# EAGLE board HLD-stat-tracker-top (EAGLE 9.6.1)
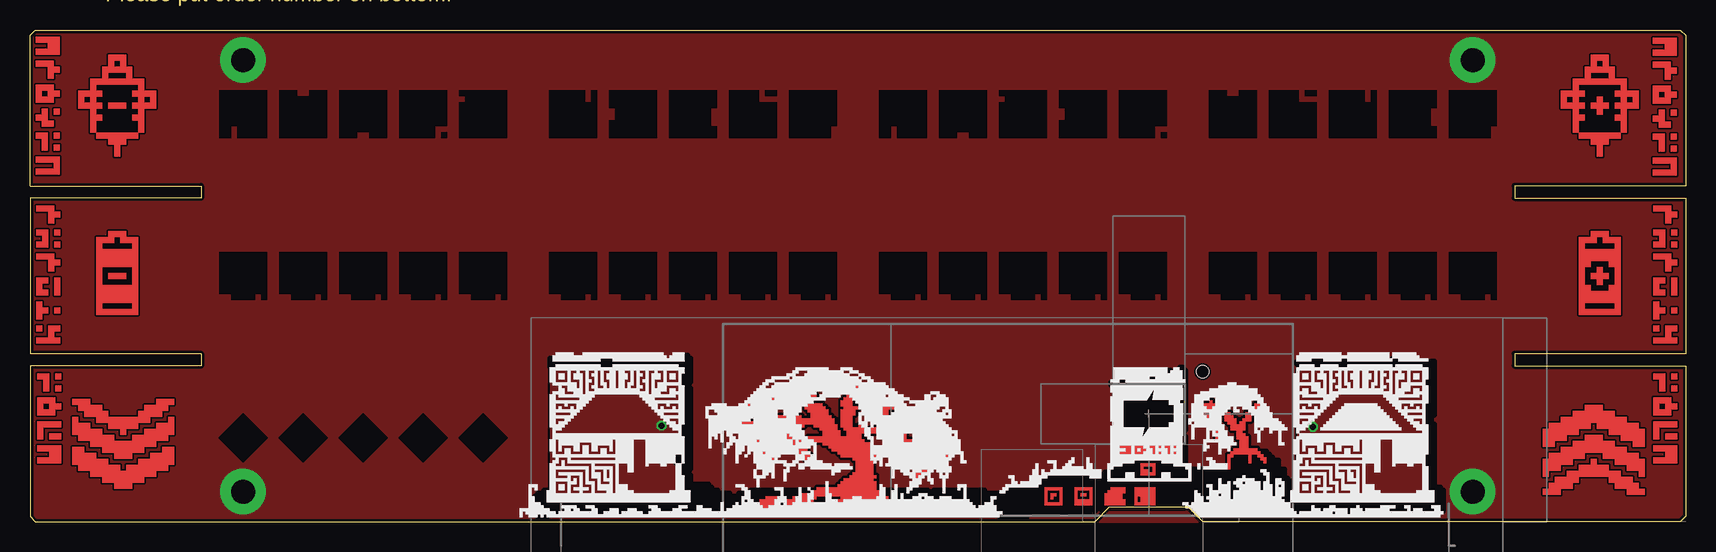
[diagram p0: board, top side]
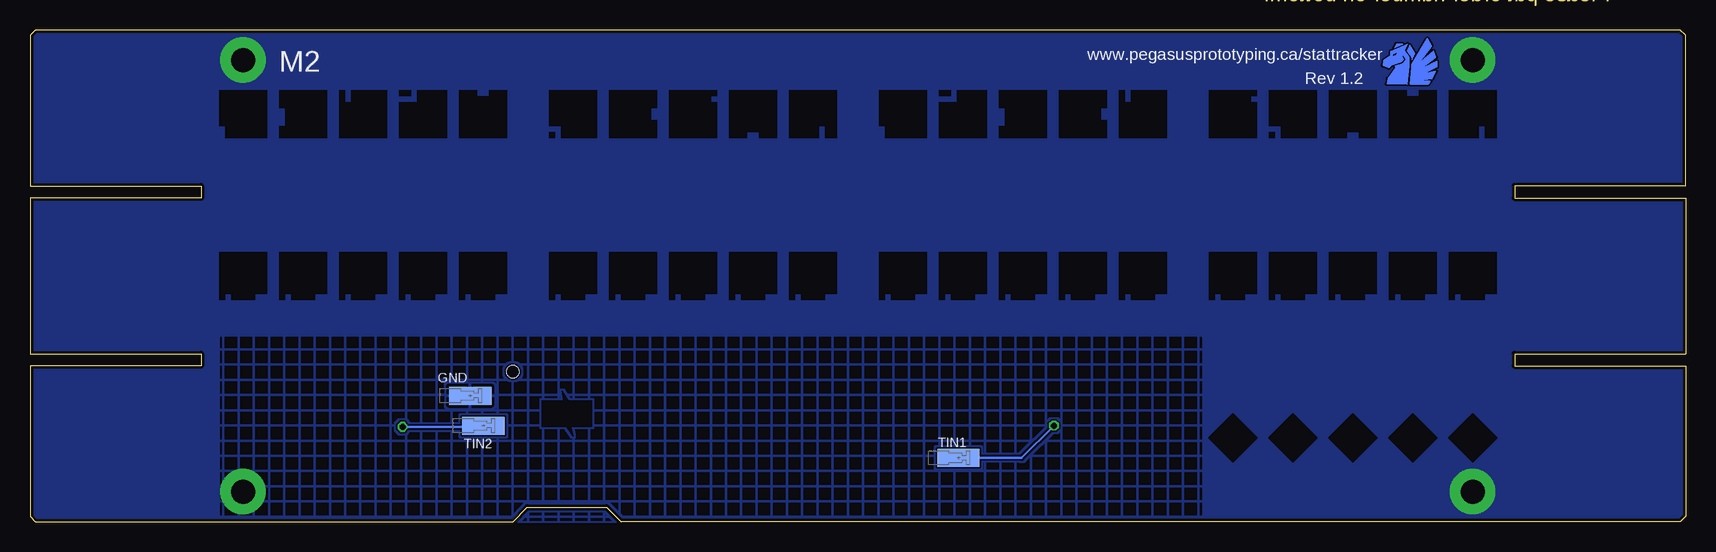
[diagram p1: board, bottom side, seen from below]

Size 138 x 41 mm. Coordinates in mm from the lower left corner, seen from the top.
Outline: 0,28 14.25,28 14.25,27 0,27 0,14 14.25,14 14.25,13 0,13 0,0.45 0.45,0 88.75,0 89.95,1.2 96.55,1.2 97.75,0 137.55,0 138,0.45 138,13 123.75,13 123.75,14 138,14 138,27 123.75,27 123.75,28 138,28 138,40.55 137.55,41 0.45,41 0,40.55 0,28
Copper layers (1*16): Top 0.035mm / dielectric 1.5mm / Bottom 0.035mm
Design rules "Makerfabs Eagle Rule 2016-06-12": minimum track width 6mil, minimum drill 0.3mm, track to track 6mil, track to pad 6mil, pad to pad 6mil, via to via 6mil, smd to smd 0mil, copper to edge 0.2mm, drill to drill 10mil, minimum pad ring 10mil, minimum via ring 6mil, stop-mask expansion 2mil, vias tented up to drill 25mil, thermal gap 10mil
Net classes: 1 touch: width 0.2 mm, clearance 0.2 mm
Holes 1 mm at 97.75,12.5

## Footprints (pad centres in the part's own frame; a part is rotated, then mirrored left to right if it is on the bottom)
81800905-CONTACT-PAD = smd 1.5 x 3.53: P$1 0,1.35

## Placement (x,y rotation side)
E$1  [HYPERLIGHTDRIFTER-LANDSCAPE]  40.45,0.5 0 top
E$2  [BATTERY-ICON]  93.25,9 0 top
E$3  [PEGASUSPROTOTYPING_5MM_COPPER]  25.25,36.5 0 bottom
GND  [81800905-CONTACT-PAD]  102.65,10.5 270 bottom
TIN1  [81800905-CONTACT-PAD]  61.95,5.3 270 bottom
TIN2  [81800905-CONTACT-PAD]  101.55,8 270 bottom
U$1  [HEALTH1]  17.75,34 0 top
U$2  [HEALTH2]  22.75,34 0 top
U$3  [HEALTH3]  27.75,34 0 top
U$4  [HEALTH4]  32.75,34 0 top
U$5  [HEALTH5]  37.75,34 0 top
U$6  [HEALTH6]  45.25,34 0 top
U$7  [HEALTH7]  50.25,34 0 top
U$8  [HEALTH8]  55.25,34 0 top
U$9  [HEALTH10]  65.25,34 0 top
U$10  [HEALTH10]  120.25,34 0 top
U$11  [HEALTH6]  45.25,34 0 top
U$12  [HEALTH1]  72.75,34 0 top
U$13  [HEALTH3]  77.75,34 0 top
U$14  [HEALTH5]  82.75,34 0 top
U$15  [HEALTH7]  87.75,34 0 top
U$16  [HEALTH4]  92.75,34 0 top
U$17  [HEALTH2]  100.25,34 0 top
U$18  [HEALTH9]  105.25,34 0 top
U$19  [HEALTH6]  110.25,34 0 top
U$20  [HEALTH8]  115.25,34 0 top
U$22  [ENERGY1]  17.75,20.5 0 top
U$23  [ENERGY1]  22.75,20.5 0 top
U$24  [ENERGY1]  27.75,20.5 0 top
U$25  [ENERGY1]  32.75,20.5 0 top
U$26  [ENERGY1]  37.75,20.5 0 top
U$27  [ENERGY1]  45.25,20.5 0 top
U$28  [ENERGY1]  50.25,20.5 0 top
U$29  [ENERGY1]  55.25,20.5 0 top
U$30  [ENERGY1]  60.25,20.5 0 top
U$31  [ENERGY1]  65.25,20.5 0 top
U$32  [ENERGY1]  72.75,20.5 0 top
U$33  [ENERGY1]  77.75,20.5 0 top
U$34  [ENERGY1]  82.75,20.5 0 top
U$35  [ENERGY1]  87.75,20.5 0 top
U$36  [ENERGY1]  92.75,20.5 0 top
U$37  [ENERGY1]  100.25,20.5 0 top
U$38  [ENERGY1]  105.25,20.5 0 top
U$39  [ENERGY1]  110.25,20.5 0 top
U$40  [ENERGY1]  115.25,20.5 0 top
U$41  [ENERGY1]  120.25,20.5 0 top
U$42  [HEALTH9]  60.25,34 0 top
U$43  [DASHDIAMOND]  17.75,7 0 top
U$44  [DASHDIAMOND]  22.75,7 0 top
U$45  [DASHDIAMOND]  27.75,7 0 top
U$46  [DASHDIAMOND]  32.75,7 0 top
U$47  [DASHDIAMOND]  37.75,7 0 top
U$48  [BATTERY-ICON-PLUS-COPPER]  130.85,20.5 0 top
U$49  [HEAL-COPPER]  130.85,34.2 0 top
U$50  [HEAL-NEG-COPPER]  7.25,34.2 0 top
U$51  [BATTERY-ICON-NEG-COPPER]  7.25,20.5 0 top
U$52  [DASH-COPPER]  130.35,6 0 top
U$53  [DASH-COPPER]  7.75,6.5 180 top
U$57  [WORD-HEALTH-COPPER]  135.25,40.4 0 top
U$58  [WORD-HEALTH-COPPER]  0.45,40.5 0 top
U$61  [WORD-ENERGY-COPPER]  0.45,26.4 0 top
U$62  [WORD-ENERGY-COPPER]  135.25,26.4 0 top
U$63  [WORD-DASH-COPPER]  0.65,12.3 0 top
U$64  [WORD-DASH-COPPER]  135.35,12.3 0 top

## Library data of the parts
E$1 E$2 U$1-U$20 U$22-U$53 U$57 U$58 U$61-U$64 = HLDRPG_sprites
E$3 GND TIN1 TIN2 = Albert

## Nets
GND: GND.P$1
TIN1 [touch]: TIN1.P$1
TIN2 [touch]: TIN2.P$1

## Tracks (layer width: path | path; a pad name or v marks a point on that pad's centre or on a via)
GND  (via drill 2 pad 3.8)
  other vias: 17.75,38.5 120.25,38.5 120.25,2.5 17.75,2.5
  pour Bottom (rank 6): 0,41 138,41 138,0 122.25,0 122.25,15.5 40.25,15.5 40.25,0 0,0
  pour Top (rank 6): 0,41 138,41 138,0 122.25,0 122.25,15.5 40.25,15.5 40.25,0 0,0
  pour Bottom (rank 4, hatched): 40.25,15.5 40.25,0 122.25,0 122.25,15.5
  pour Top (isolate 0.2, rank 2): 40.25,15.5 40.25,0 122.25,0 122.25,15.5
TIN1  (via drill 0.5)
  Bottom 0.2: v52.65,8 55.35,5.3 TIN1.P$1
  pour Top (isolate 0.2, no thermals): 53.93,12.5 53.93,2.48 arc-90 53.45,2 43.89,2 arc-90 43.55,2.34 43.55,12.5 arc-90 43.75,12.7 53.73,12.7 arc-90
TIN2  (via drill 0.5)
  Bottom 0.2: TIN2.P$1 100.3,7.9 v106.95,7.9
  pour Top (isolate 0.2, no thermals): 116.15,12.4 116.15,2.4 arc-90 115.65,1.9 106.7,1.9 arc-90 105.85,2.75 105.85,12.36 arc-90 106.19,12.7 115.85,12.7 arc-90

## Text on the board
Dimension: Please put order number on bottom!
bPlace: www.pegasusprototyping.ca/stattracker | Rev 1.2 | M2